# Altium PCB CANLink.PcbDoc (part 1 of 2)
Units mm, origin at the board's own origin, x right, y up, seen from the top; angles counter-clockwise.
Board outline 75 x 49 mm, 2 copper layers (Top Layer, Bottom Layer); 106 components, 90 nets, 440 pads, 174 vias.
Unrouted connection lines stored in the file: 6.
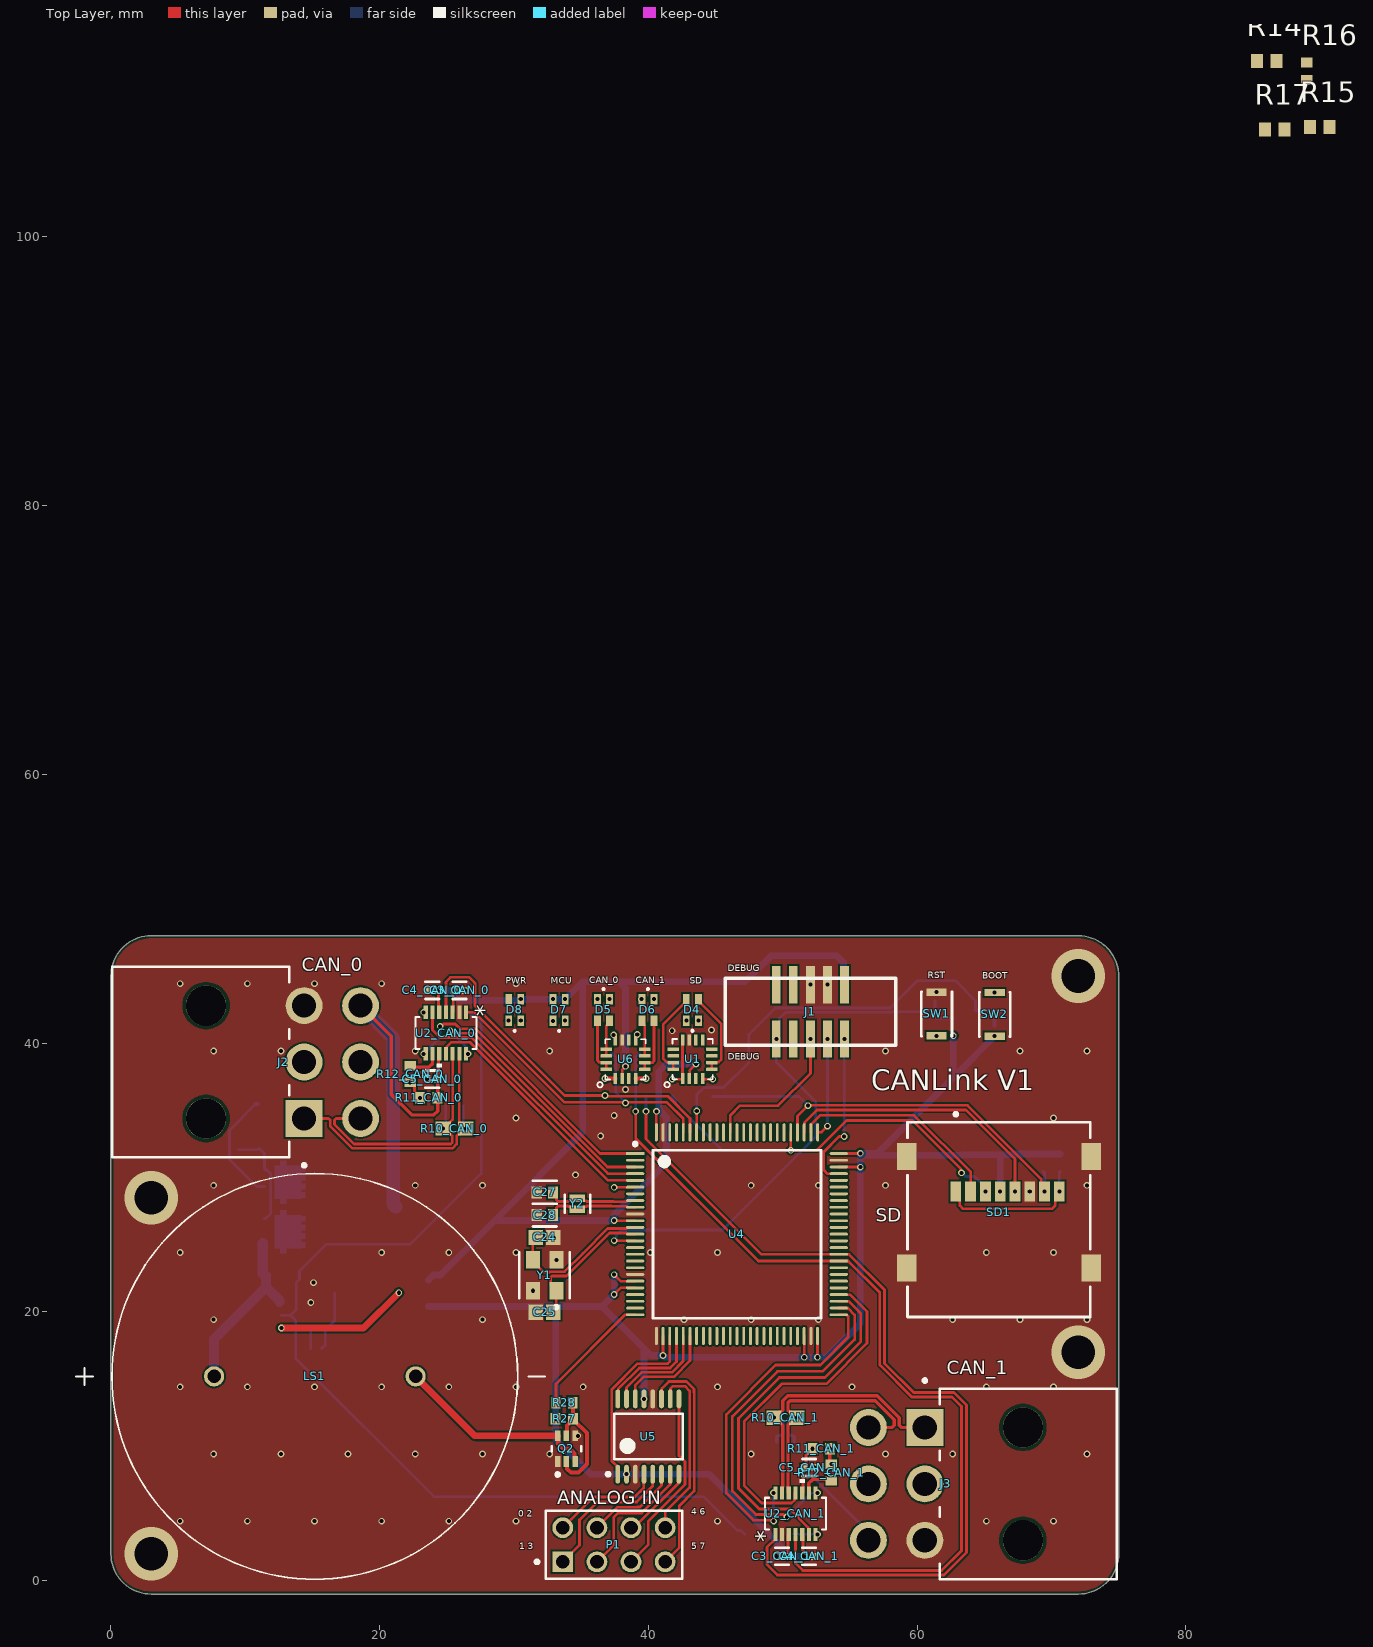
[diagram p0: Top Layer view]
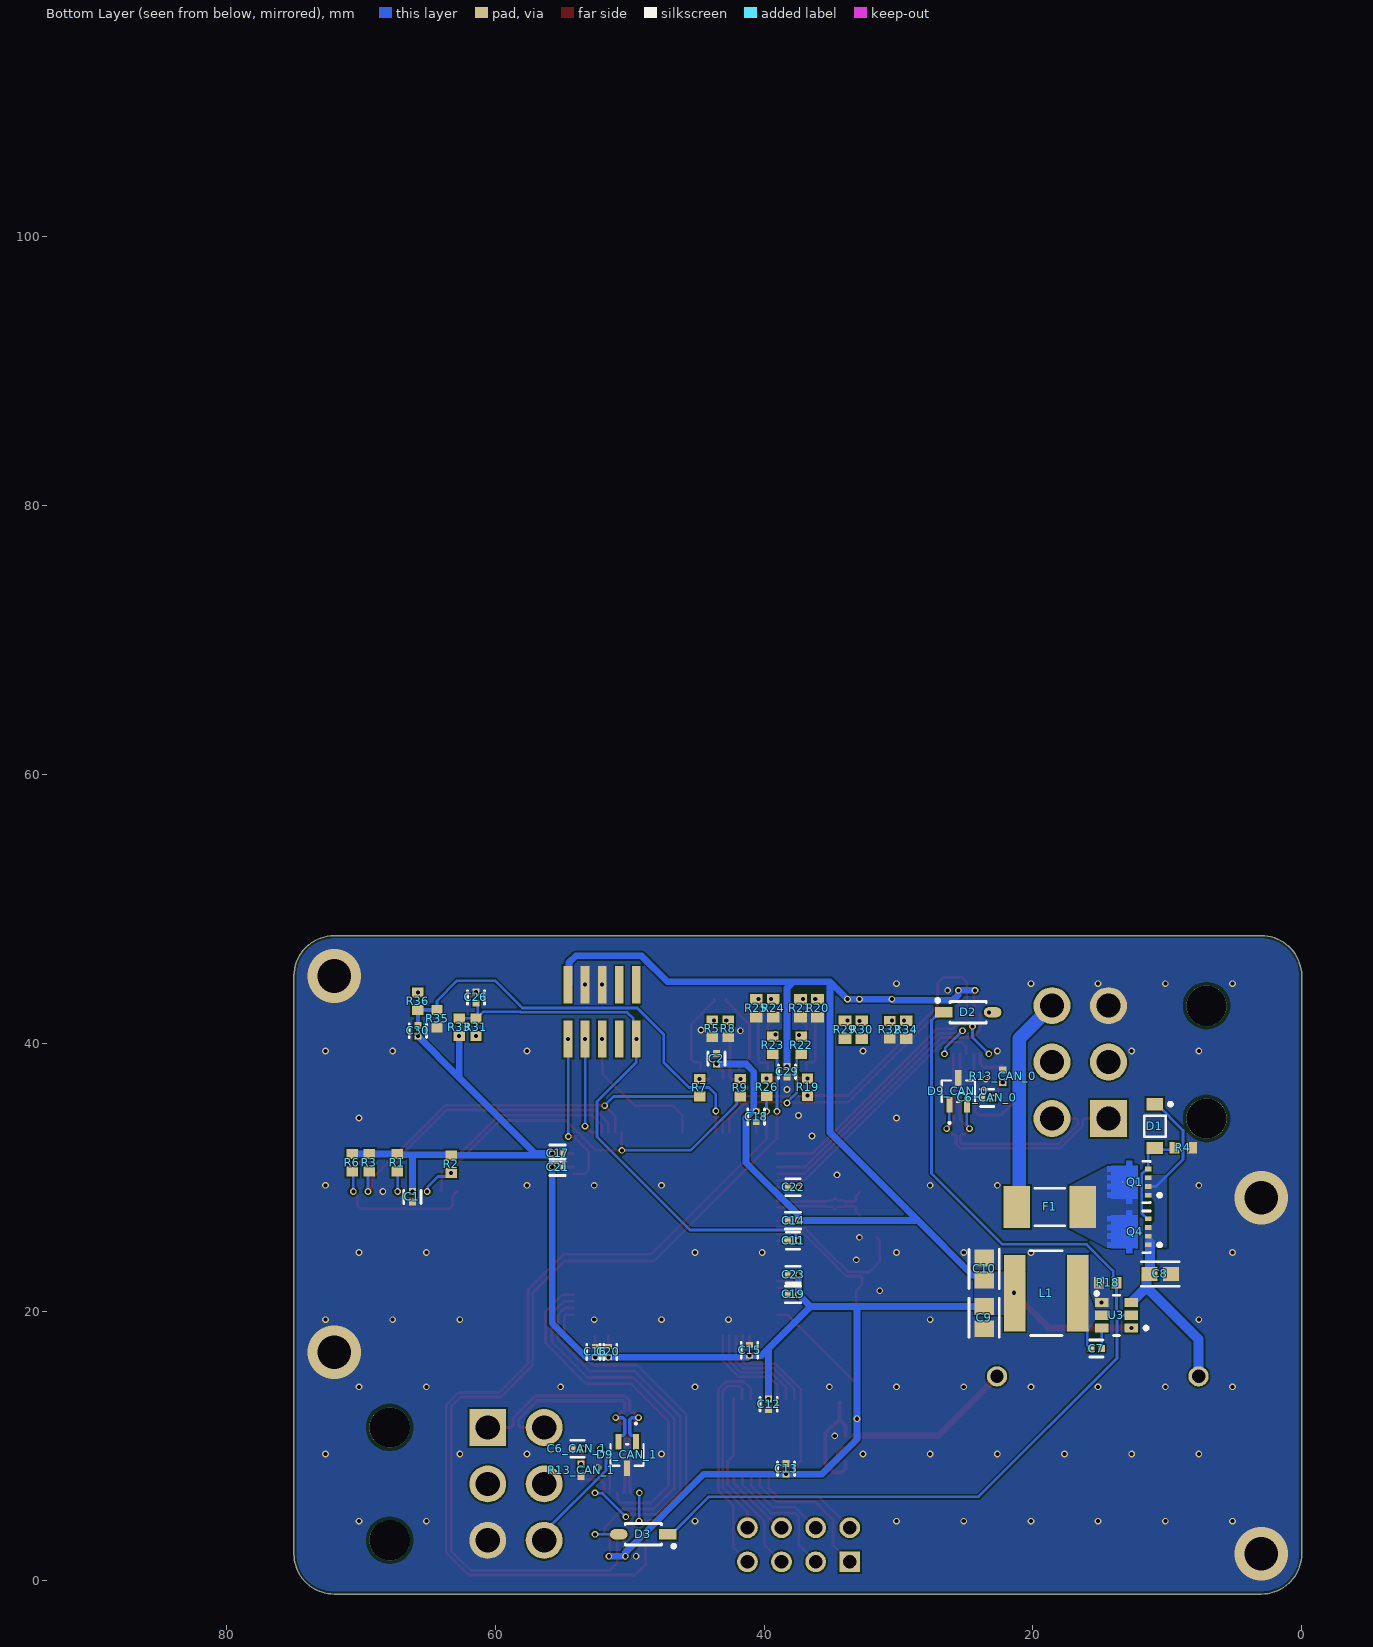
[diagram p1: Bottom Layer view, seen from below]
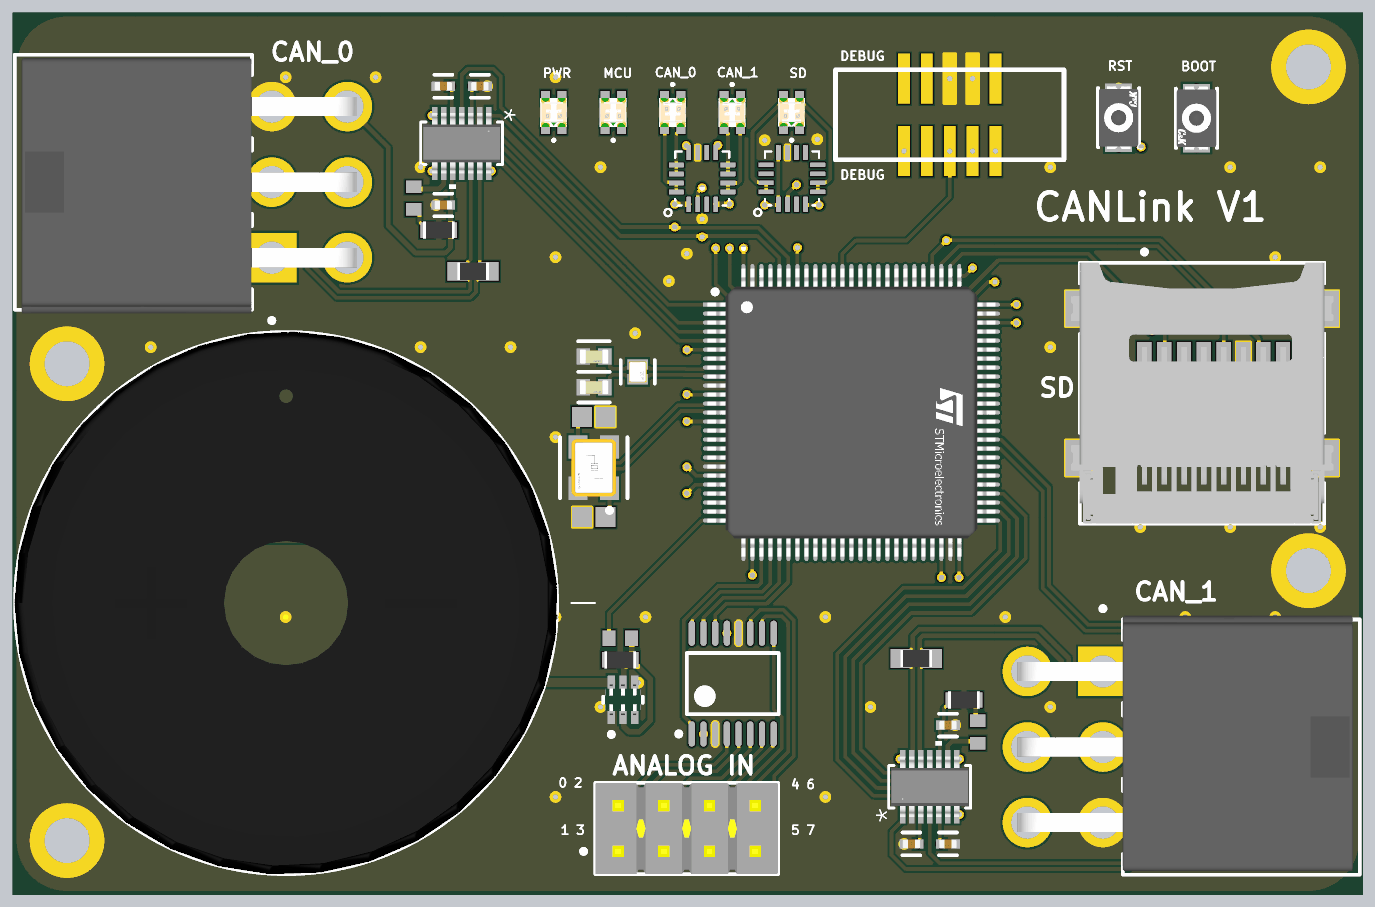
[diagram p3: 3D render of the assembled board from above, using the file's embedded part models]
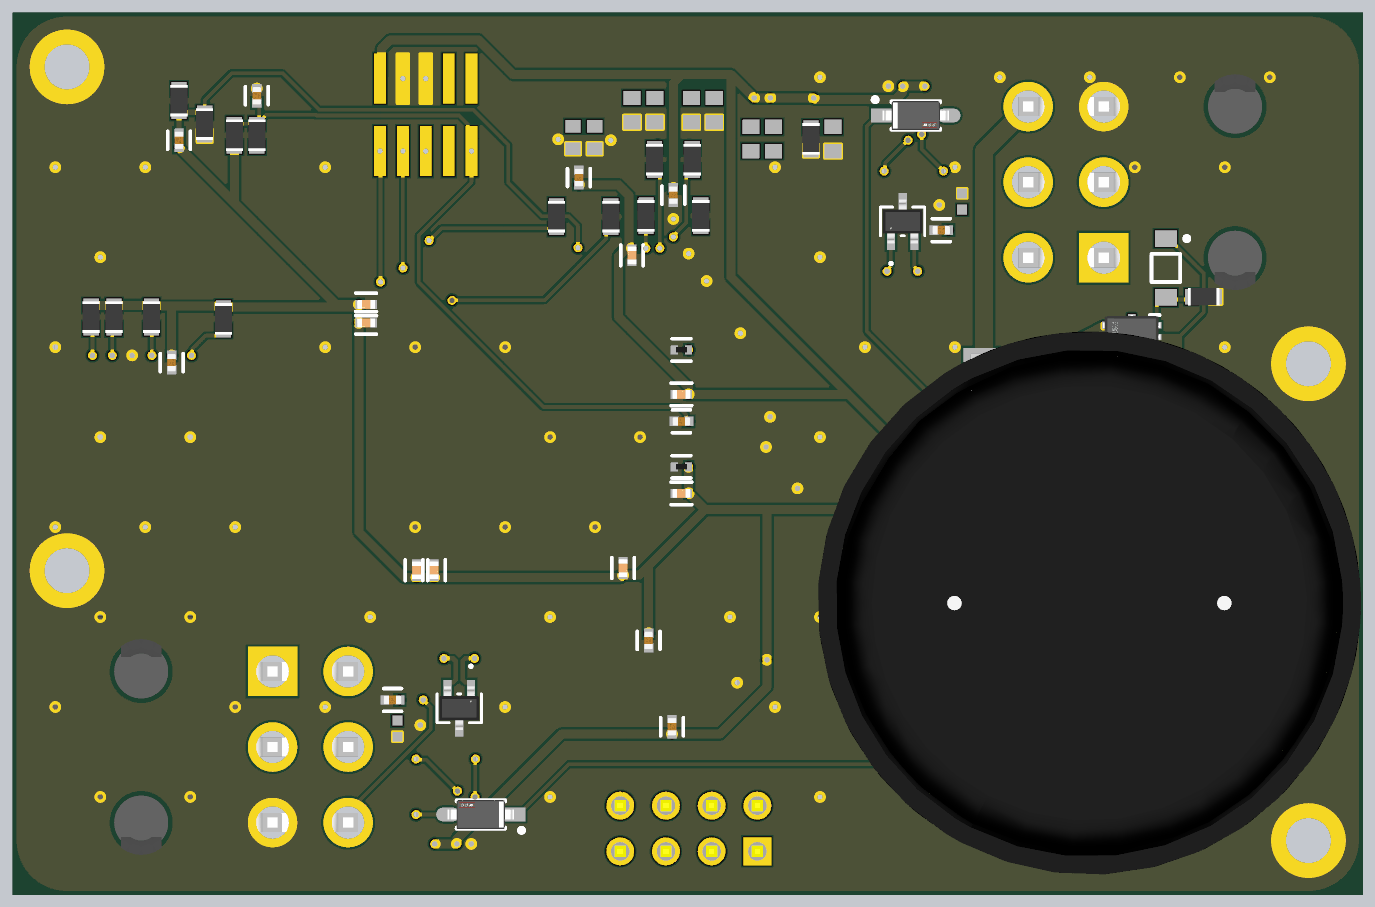
[diagram p4: 3D render of the assembled board from below, using the file's embedded part models]

## Layer stack, top to bottom
Top Solder: solder mask 0.0102, Solder Resist, Dk 3.5
Top Layer: signal copper 0.0356
Dielectric 1: dielectric 0.32, FR-4, Dk 4.8
Bottom Layer: signal copper 0.0356
Bottom Solder: solder mask 0.0102, Solder Resist, Dk 3.5

## Board outline
0,2 0,45 cw(c3,45) 3,48 72,48 cw(c72,45) 75,45 75,2 cw(c72,2) 72,-1 3,-1 cw(c3,2)

## Design rules (kind name [scope] priority, off if disabled: settings)
BoardOutlineClearance [All] p1: gap=0.2 ignorepadtopadclearanceinfootprint=FALSE
Clearance [All] p1: gap=0.127 ignorepadtopadclearanceinfootprint=FALSE except(0.25: Arc-Hole Track-Hole SMDPad-Hole THPad-Hole Via-Hole Fill-Hole Poly-Hole Region-Hole Text-Hole)
ComponentClearance [All] p1: gap=0.127 collisioncheckmode=3 verticalgap=0.127 showdistances=TRUE
DiffPairsRouting [All] p1: maxlimit=0.254 minlimit=0.127 mostfreqgap=0.127 toplayer_minwidth=0.127 toplayer_maxwidth=25.4 toplayer_prefwidth=0.127 bottomlayer_minwidth=0.127 bottomlayer_maxwidth=25.4 bottomlayer_prefwidth=0.127 maxuncoupledlength=12.7
Height [All] p1: minheight=0 maxheight=1816.048 prefheight=12.7
HoleSize [All] p1: absolutevalues=TRUE maxlimit=6.3 minlimit=0.3 maxpercent=80.000 minpercent=20.000
HoleToHoleClearance [All] p1: gap=0.25 allowstackedmicrovias=FALSE
MinimumAnnularRing [All] p1: minimumring=0.076
MinimumSolderMaskSliver [All] p1: minsoldermaskwidth=0
PlaneClearance [All] p1: clearance=0.127
PlaneConnect PlaneConnectPowerPads [InPadClass('PowerPads')] p1: planeconnectstyle=Direct reliefexpansion=0.508 reliefentries=4 reliefconductorwidth=0.254 reliefairgap=0.254
PlaneConnect [All] p2: pad.planeconnectstyle=Relief pad.reliefexpansion=0.3 pad.reliefentries=4 pad.reliefconductorwidth=0.127 pad.reliefairgap=0.127 via.planeconnectstyle=Direct via.reliefexpansion=0.3 via.reliefentries=4 via.reliefconductorwidth=0.127 via.reliefairgap=0.127
PolygonConnect PolygonConnectPowerPads [All vs (InPadClass('PowerPads'))] p1: connectstyle=Direct reliefconductorwidth=0.254 reliefentries=4 polygonreliefangle="90 Angle" airgapwidth=0.254
PolygonConnect [All] p2: connectstyle=Direct reliefconductorwidth=0.127 reliefentries=4 polygonreliefangle="90 Angle" airgapwidth=0.127
RoomDefinition CAN_1 [InComponentClass('CAN_1')] p1: confinementstyle=ConfineIn formatcopy=TRUE lockcomponents=FALSE outline 55.52,0.798 55.52,13.625 47.9,13.625 47.9,0.798
RoomDefinition CAN_0 [InComponentClass('CAN_0')] p2: confinementstyle=ConfineIn formatcopy=TRUE lockcomponents=FALSE outline 20.361,44.945 20.361,32.118 27.981,32.118 27.981,44.945
RoutingVias [All] p1: holewidth=0.3 width=0.6 viastyle="Through Hole" minholewidth=0.3 minwidth=0.6 maxholewidth=0.6 maxwidth=6.6
SilkToSilkClearance [All] p1: silktosilkclearance=0
SilkToSolderMaskClearance [IsPad] p1: minsilkscreentomaskgap=0.127 clearancetoexposedcopper=TRUE
SolderMaskExpansion [All] p1: expansion=0.075 istentingtop=FALSE
Width [All] p1: maxlimit=25.4 minlimit=0.127 preferedwidth=0.127 minimp=50.000000 maximp=50.000000 favimp=50.000000
20 further rules are at their usual default settings.

## Classes and differential pairs
channel class CAN_IF: CAN_0 CAN_1
component class SD_0: C1 C2 D4 R1 R2 R3 R5 R6 R7 R8 R9 SD1 U1
component class PWR_MGMT: C7 C8 C9 C10 D1 F1 L1 Q1 Q4 R4 R14 R15 R16 R17 R18 U3
component class MCU_0: C11 C12 C13 C14 C15 C16 C17 C18 C19 C20 C21 C22 C23 C24 C25 C26 C27 C28 C29 C30 D5 D6 D7 D8 J1 LS1 Q2 R19 R20 R21 R22 R23 R24 R25 R26 R27 R28 R29 R30 R31 R32 R33 R34 R35 R36 SW1 SW2 U4 U5 U6 Y1 Y2
component class CANLink: D2 D3 J2 J3 P1
component class CAN_1: C3_CAN_1 C4_CAN_1 C5_CAN_1 C6_CAN_1 D9_CAN_1 R10_CAN_1 R11_CAN_1 R12_CAN_1 R13_CAN_1 U2_CAN_1
component class CAN_0: C3_CAN_0 C4_CAN_0 C5_CAN_0 C6_CAN_0 D9_CAN_0 R10_CAN_0 R11_CAN_0 R12_CAN_0 R13_CAN_0 U2_CAN_0
differential pair X: +X_P -X_N
differential pair X32: +X32_P -X32_N
differential pair CAN1: +CAN1_P -CAN1_N
differential pair CAN0: +CAN0_P -CAN0_N

## Components (designator, comment, footprint, x,y, rotation, side; value= is the part's Value field where it differs from the comment)
C1 "C0402C104K8PACTU" FP-C0402-BB-MFG 66.182,28.566 r270 bottom value="0.10 μF"
C2 "C0402C104K8PACTU" FP-C0402-BB-MFG 43.55,38.85 r270 bottom value="0.10 μF"
C3_CAN_0 "C0402C104K8PACTU" FP-C0402-BB-MFG 25.949,43.929 r180 top value="0.10 μF" (schematic designator C3)
C3_CAN_1 "C0402C104K8PACTU" FP-C0402-BB-MFG 49.932,1.814 r0 top value="0.10 μF" (schematic designator C3)
C4_CAN_0 "C0402C104K8PACTU" FP-C0402-BB-MFG 23.917,43.929 r0 top value="0.10 μF" (schematic designator C4)
C4_CAN_1 "C0402C104K8PACTU" FP-C0402-BB-MFG 51.964,1.814 r180 top value="0.10 μF" (schematic designator C4)
C5_CAN_0 "C0402C104K8PACTU" FP-C0402-BB-MFG 23.917,37.325 r0 top value="0.10 μF" (schematic designator C5)
C5_CAN_1 "C0402C104K8PACTU" FP-C0402-BB-MFG 51.964,8.418 r180 top value="0.10 μF" (schematic designator C5)
C6_CAN_0 "C0402C104K8PACTU" FP-C0402-BB-MFG 23.409,35.928 r180 bottom value="0.10 μF" (schematic designator C6)
C6_CAN_1 "C0402C104K8PACTU" FP-C0402-BB-MFG 53.907,9.815 r180 bottom value="0.10 μF" (schematic designator C6)
C7 "C0402C104K8PACTU" FP-C0402-BB-MFG 15.281,17.275 r0 bottom value="0.10 μF"
C8 "GRM188R60J106ME47D" FP-GRM188-0_1-e0_2_0_55-IPC_A 10.525,22.825 r180 bottom
C9 "GRM21BR61E226ME44L" FP-GRM21B-0_2-e0_2_0_7-IPC_B 23.628,19.572 r270 bottom
C10 "GRM21BR61E226ME44L" FP-GRM21B-0_2-e0_2_0_7-IPC_B 23.628,23.197 r90 bottom
C11 "C0402C104K8PACTU" FP-C0402-BB-MFG 37.85,25.3 r0 bottom value="0.10 μF"
C12 "C0402C104K8PACTU" FP-C0402-BB-MFG 39.675,13.125 r270 bottom value="0.10 μF"
C13 "C0402C104K8PACTU" FP-C0402-BB-MFG 38.375,8.325 r90 bottom value="0.10 μF"
C14 "C1005X7S1A225K050BC" FP-C1005-050-0_15-0_1-MFG 37.85,26.8 r180 bottom
C15 "C1005X7S1A225K050BC" FP-C1005-050-0_15-0_1-MFG 41.094,17.15 r270 bottom
C16 "C1005X7S1A225K050BC" FP-C1005-050-0_15-0_1-MFG 52.575,17.025 r270 bottom
C17 "C1005X7S1A225K050BC" FP-C1005-050-0_15-0_1-MFG 55.375,31.8 r0 bottom
C18 "C1005X7S1A225K050BC" FP-C1005-050-0_15-0_1-MFG 40.6,34.525 r90 bottom
C19 "C1005X7S1A225K050BC" FP-C1005-050-0_15-0_1-MFG 37.85,21.3 r180 bottom
C20 "C1005X7S1A225K050BC" FP-C1005-050-0_15-0_1-MFG 51.596,17.029 r270 bottom
C21 "C1005X7S1A225K050BC" FP-C1005-050-0_15-0_1-MFG 55.375,30.775 r0 bottom
C22 "GRM155R71C104KA88D" FP-GRM15-MFG 37.85,29.275 r180 bottom value=0.10μF
C23 "GRM155R71C104KA88D" FP-GRM15-MFG 37.85,22.775 r180 bottom value=0.10μF
C24 "06032U6R8CAT2A" CAPC1508X91X51ML25T26 32.275,25.55 r180 top
C25 "06032U6R8CAT2A" CAPC1508X91X51ML25T26 32.275,19.975 r0 top
C26 "C0402C104K8PACTU" FP-C0402-BB-MFG 61.45,43.4 r90 bottom value="0.10 μF"
C27 "C0603C180J1GACTU" FP-C0603C-CF-MFG 32.292,28.9 r180 top value="18 pF"
C28 "C0603C180J1GACTU" FP-C0603C-CF-MFG 32.292,27.2 r180 top value="18 pF"
C29 "C0402C104K8PACTU" FP-C0402-BB-MFG 38.3,37.875 r270 bottom value="0.10 μF"
C30 "C0402C104K8PACTU" FP-C0402-BB-MFG 65.775,40.925 r270 bottom value="0.10 μF"
D1 "MMSZ5242BT1G" ONSC-SOD-123-2-425-04_V 10.925,33.825 r270 bottom
D2 "1N4148W-TP" FP-SOD-123-IPC_A 24.825,42.3 r180 bottom
D3 "1N4148W-TP" FP-SOD-123-IPC_A 49,3.45 r0 bottom
D4 "150066RG54050" WL-SBCD_0606 43.274,42.475 r180 top
D5 "150066RG54050" WL-SBCD_0606 36.662,42.473 r0 top
D6 "150066RG54050" WL-SBCD_0606 39.968,42.473 r0 top
D7 "150066RG54050" WL-SBCD_0606 33.356,42.473 r180 top
D8 "150066RG54050" WL-SBCD_0606 30.05,42.473 r180 top
D9_CAN_0 "VCAN26A2-03G-E3-08" VCAN26A2-03G-E3-08-Footprint-1 25.553,36.411 r180 bottom (schematic designator D9)
D9_CAN_1 "VCAN26A2-03G-E3-08" VCAN26A2-03G-E3-08-Footprint-1 50.2,9.351 r0 bottom (schematic designator D9)
F1 "0679L1000-05" FP-0679L-MFG 18.75,27.813 r180 bottom value=0.0038Ω
J1 "HYDRA_PROGRAMMING_HEADER" 3220-10-0300-00-Footprint-1 54.6,40.32 r180 top
J2 "455580003" FP-455580003-MFG 6.88,38.595 r90 top
J3 "455580003" FP-455580003-MFG 68.075,7.2 r270 top
L1 "1255AY-3R9N=P3" FP-DG6045C-MFG 19.006,21.4 r0 bottom
LS1 "AI-3035-TT-12V-R" AI-3035-TT-12V-R-Footprint-1 15.175,15.2 r0 top
P1 "TSW-104-08-L-D" SMTC-TSW-104-08-L-D_V 37.44,2.67 r0 top
Q1 "SISH615ADN-T1-GE3" SISH615ADN-T1-GE3-Footprint-1 12.825,29.625 r90 bottom
Q2 "SSM6N7002KFU,LF" FP-SSOP6-P-0_65A-MFG 33.9,9.825 r90 top
Q4 "SISH615ADN-T1-GE3" SISH615ADN-T1-GE3-Footprint-1 12.825,25.925 r90 bottom
R1 "ERJ3EKF1002V" RESC1609X55X30LL15T15 67.3,31.1 r90 bottom
R2 "ERJ3EKF1002V" RESC1609X55X30LL15T15 63.3,31 r90 bottom
R3 "ERJ3EKF1002V" RESC1609X55X30LL15T15 69.389,31.099 r90 bottom
R4 "ERJ3EKF1002V" RESC1609X55X30LL15T15 8.825,32.225 r180 bottom
R5 "ERJ-3EKF1001V" RESC1608X55X30LL15T15#1 43.875,41.075 r270 bottom
R6 "ERJ3EKF1002V" RESC1609X55X30LL15T15 70.659,31.099 r90 bottom
R7 "ERJ3EKF1002V" RESC1609X55X30LL15T15 44.8,36.675 r90 bottom
R8 "ERJ-3EKF1001V" RESC1608X55X30LL15T15#1 42.675,41.075 r270 bottom
R9 "ERJ3EKF1002V" RESC1609X55X30LL15T15 41.775,36.675 r270 bottom
R10_CAN_0 "ERJ-3EKF1200V" RESC1609X55X30ML15T15 25.568,33.642 r0 top (schematic designator R10)
R10_CAN_1 "ERJ-3EKF1200V" RESC1609X55X30ML15T15 50.2,12.125 r180 top (schematic designator R10)
R11_CAN_0 "ERJ3EKF1002V" RESC1609X55X30LL15T15 23.663,35.928 r180 top (schematic designator R11)
R11_CAN_1 "ERJ3EKF1002V" RESC1609X55X30LL15T15 52.853,9.815 r0 top (schematic designator R11)
R12_CAN_0 "ERJ-3EKF1001V" RESC1608X55X30LL15T15#1 22.266,37.706 r270 top (schematic designator R12)
R12_CAN_1 "ERJ-3EKF1001V" RESC1608X55X30LL15T15#1 53.615,8.037 r90 top (schematic designator R12)
R13_CAN_0 "0402 JUMPER 0 OHM" RESC1005X40X25NL05T05 22.247,37.521 r270 bottom (schematic designator R13)
R13_CAN_1 "0402 JUMPER 0 OHM" RESC1005X40X25NL05T05 53.634,8.222 r90 bottom (schematic designator R13)
R14 "ERJ-3EKF1003V" RESC1608X55X30ML15T15 86.025,113.1 r0 top
R15 "ERJ-3EKF1003V" RESC1608X55X30ML15T15 89.975,108.2 r0 top
R16 "ERJ3EKF1002V" RESC1609X55X30LL15T15 89,112.325 r90 top
R17 "ERJ-3EKF1003V" RESC1608X55X30ML15T15 86.614,108.009 r0 top
R18 "ERJ3EKF1002V" RESC1609X55X30LL15T15 14.431,22.175 r0 bottom
R19 "ERJ3EKF1002V" RESC1609X55X30LL15T15 36.775,36.725 r90 bottom
R20 "ERJ3EKF51R0V" RESC1608X55X30NL15T15 36.025,42.6 r270 bottom
R21 "ERJ3EKF51R0V" RESC1608X55X30NL15T15 37.3,42.6 r270 bottom
R22 "ERJ3EKF1002V" RESC1609X55X30LL15T15 37.25,39.85 r90 bottom
R23 "ERJ3EKF1002V" RESC1609X55X30LL15T15 39.35,39.85 r90 bottom
R24 "ERJ3EKF51R0V" RESC1608X55X30NL15T15 39.325,42.6 r270 bottom
R25 "ERJ3EKF51R0V" RESC1608X55X30NL15T15 40.6,42.6 r270 bottom
R26 "ERJ3EKF1002V" RESC1609X55X30LL15T15 39.825,36.725 r90 bottom
R27 "ERJ3EKF1002V" RESC1609X55X30LL15T15 33.75,12.048 r180 top
R28 "ERJ-3EKF1001V" RESC1608X55X30LL15T15#1 33.75,13.25 r0 top
R29 "ERJ3EKF51R0V" RESC1608X55X30NL15T15 33.988,40.998 r270 bottom
R30 "ERJ3EKF51R0V" RESC1608X55X30NL15T15 32.737,40.998 r270 bottom
R31 "ERJ-3EKF3300V" RESC1608X55X30LL15T15#2 61.45,41.2 r270 bottom
R32 "ERJ-3EKF3300V" RESC1608X55X30LL15T15#2 30.65,40.998 r270 bottom
R33 "ERJ3EKF1002V" RESC1609X55X30LL15T15 62.7,41.2 r90 bottom
R34 "ERJ3EKF51R0V" RESC1608X55X30NL15T15 29.425,40.998 r270 bottom
R35 "ERJ3EKF1002V" RESC1609X55X30LL15T15 64.35,41.825 r90 bottom
R36 "ERJ-3EKF3300V" RESC1608X55X30LL15T15#2 65.775,43.125 r90 bottom
SD1 "47219-2001" MOLX-47219-2001-8_V 66.087,27.416 r0 top
SW1 "KXT331LHS" FP-KXT331LHS-MFG 61.45,42.175 r90 top
SW2 "KXT331LHS" FP-KXT331LHS-MFG 65.775,42.15 r270 top
U1 "LM2902Q4T" LM2902Q4T-Footprint-1 43.29,38.805 r90 top
U2_CAN_0 "TCAN1146DYYRQ1" TCAN1146DYYRQ1-Footprint-1 24.933,40.754 r270 top (schematic designator U2)
U2_CAN_1 "TCAN1146DYYRQ1" TCAN1146DYYRQ1-Footprint-1 50.948,4.989 r90 top (schematic designator U2)
U3 "AP63203WU-7" FP-TSOT26-MFG 13.781,19.75 r0 bottom
U4 "STM32H730VBT6" FP-LQFP100-1L-IPC_C 46.594,25.788 r0 top
U5 "ADC088S022CIMT/NOPB" MTC16_L 40,10.725 r90 top
U6 "LM2902Q4T" LM2902Q4T-Footprint-1 38.3,38.8 r90 top
Y1 "ABM8-48.000MHZ-B2-T" FP-ABM8-MFG 32.275,22.725 r90 top
Y2 "ECS-.327-12.5-1210-TR" FP-ECX-1210-MFG 34.717,28.05 r270 top

## Footprints (in the part's own frame and the unit in brackets; to place one, negate y for a bottom-side part, rotate by r counter-clockwise, add the part's x,y. Pads: shape width x height; smd on the part's side, far side on the other; paste and mask are expansions set on the pad)
3220-10-0300-00-Footprint-1 [mm]
  rect 0.65x2.77 all layers, no hole: 1(0,-4.03) 2(0,0) 3(1.27,-4.03) 4(1.27,0) 5(2.54,-4.03) 6(2.54,0) 7(3.81,-4.03) 8(3.81,0) 9(5.08,-4.03) 10(5.08,0)
  silkscreen extent -3.81,-4.51 8.89,0.49
AI-3035-TT-12V-R-Footprint-1 [mm]
  round 1.508 hole 1: N(7.5,0) P(-7.5,0)
  silkscreen extent -17.78,-15.1 17.14,15.1, body extent -15.1,-15.1 15.1,15.1, height 2.15
CAPC1508X91X51ML25T26 [mm] "Chip Capacitor, 2-Leads, Body 1.52x0.76mm, IPC Low Density"
  rect 1.1x1.12 smd: 1(-0.65,0) 2(0.65,0)
  body extent -0.89,-0.51 0.88,0.5, height 0.91
FP-0679L-MFG [mm]
  rect 1.96x3.15 smd paste+0 mask+0: 1(-2.455,0) 2(2.455,0)
  silkscreen extent -1.1,-1.4 1.1,1.4, body extent -3.05,-1.29 3.05,1.25, height 2.54
FP-455580003-MFG [mm]
  rect 2.75x2.75 hole 1.8 paste-2539.97 mask+0: 1(-4.2,-7.5)
  round 2.75 hole 1.8 paste-2539.97 mask+0: 2(0,-7.5) 3(4.2,-7.5) 4(-4.2,-11.7) 5(0,-11.7) 6(4.2,-11.7)
  round 3 hole 3 unplated paste-2539.97 mask+0: ""(-4.2,-0.2) ""(4.2,-0.2)
  silkscreen extent -7.81,-7.63 7.09,6.78, body extent -7.19,-13.18 7.19,6.88, height 0.25
FP-ABM8-MFG [mm]
  rect 1.3x1.05 smd paste+0 mask+0: 1(-1.15,-0.875) 2(1.15,-0.875) 3(1.15,0.875) 4(-1.15,0.875)
  silkscreen extent -2.5,-1.88 1.7,1.88, body extent -1.6,-1.25 1.6,1.25, height 0.8
FP-C0402-BB-MFG [mm]
  rect 0.52x0.52 smd paste+0 mask+0: 1(-0.4,0) 2(0.4,0)
  silkscreen extent -0.5,-0.64 0.5,0.64, body extent -0.5,-0.25 0.5,0.25, height 0.55
FP-C0603C-CF-MFG [mm]
  rect 0.75x0.9 smd paste+0 mask+0: 1(-0.6,0) 2(0.6,0)
  silkscreen extent -0.87,-0.85 0.88,0.85, body extent -0.8,-0.4 0.8,0.4, height 0.87
FP-C1005-050-0_15-0_1-MFG [mm]
  rect 0.4x0.5 smd paste+0 mask+0: 1(-0.4,0) 2(0.4,0)
  silkscreen extent -0.58,-0.63 0.58,0.63, body extent -0.5,-0.25 0.5,0.25, height 0.65
FP-DG6045C-MFG [mm]
  rect 1.6x5.7 smd paste+0 mask+0: 1(-2.35,0) 2(2.35,0)
  silkscreen extent -3.87,-3.15 1.17,3.15, body extent -3,-3 3,3, height 4.5
FP-ECX-1210-MFG [mm]
  rect 0.575x1.14 smd paste+0 mask+0: 1(-0.413,0) 2(0.413,0)
  silkscreen extent -0.65,-0.95 0.65,0.95, body extent -0.6,-0.5 0.6,0.5, height 0.5
FP-GRM15-MFG [mm]
  rect 0.4x0.5 smd paste+0 mask+0: 1(-0.4,0) 2(0.4,0)
  silkscreen extent -0.53,-0.63 0.53,0.63, body extent -0.3,-0.16 0.3,0.16, height 0.33
FP-GRM21B-0_2-e0_2_0_7-IPC_B [mm]
  rect 1.255x1.456 smd paste+0 mask+0: 1(-0.826,0) 2(0.826,0)
  silkscreen extent -1.45,-1.13 1.45,1.13, body extent -1,-0.63 1,0.63, height 1.45
FP-GRM188-0_1-e0_2_0_55-IPC_A [mm]
  rect 1.208x1.012 smd paste+0 mask+0: 1(-0.802,0) 2(0.802,0)
  silkscreen extent -1.41,-0.91 1.41,0.91, body extent -0.8,-0.4 0.8,0.4, height 0.9
FP-KXT331LHS-MFG [mm]
  rect 0.55x1.5 smd paste+0 mask+0: 1(-1.625,0) 2(1.625,0)
  silkscreen extent -1.65,-1.15 1.65,1.15, body extent -2,-1.25 2,1.25, height 0.25
FP-LQFP100-1L-IPC_C [mm]
  rect 1.355x0.212 smd paste+0 mask+0: 1(-7.575,6)
  rrect100% 1.355x0.212 smd paste+0 mask+0: 2(-7.575,5.5) 3(-7.575,5) 4(-7.575,4.5) 5(-7.575,4) 6(-7.575,3.5) 7(-7.575,3) 8(-7.575,2.5) 9(-7.575,2) 10(-7.575,1.5) 11(-7.575,1) 12(-7.575,0.5) 13(-7.575,0) 14(-7.575,-0.5) 15(-7.575,-1) 16(-7.575,-1.5) 17(-7.575,-2) 18(-7.575,-2.5) 19(-7.575,-3) 20(-7.575,-3.5) 21(-7.575,-4) 22(-7.575,-4.5) 23(-7.575,-5) 24(-7.575,-5.5) 25(-7.575,-6) 51(7.575,-6) 52(7.575,-5.5) 53(7.575,-5) 54(7.575,-4.5) 55(7.575,-4) 56(7.575,-3.5) 57(7.575,-3) 58(7.575,-2.5) 59(7.575,-2) 60(7.575,-1.5) 61(7.575,-1) 62(7.575,-0.5) 63(7.575,0) 64(7.575,0.5) 65(7.575,1) 66(7.575,1.5) 67(7.575,2) 68(7.575,2.5) 69(7.575,3) 70(7.575,3.5) 71(7.575,4) 72(7.575,4.5) 73(7.575,5) 74(7.575,5.5) 75(7.575,6)
  rrect100% 0.212x1.355 smd paste+0 mask+0: 26(-6,-7.575) 27(-5.5,-7.575) 28(-5,-7.575) 29(-4.5,-7.575) 30(-4,-7.575) 31(-3.5,-7.575) 32(-3,-7.575) 33(-2.5,-7.575) 34(-2,-7.575) 35(-1.5,-7.575) 36(-1,-7.575) 37(-0.5,-7.575) 38(0,-7.575) 39(0.5,-7.575) 40(1,-7.575) 41(1.5,-7.575) 42(2,-7.575) 43(2.5,-7.575) 44(3,-7.575) 45(3.5,-7.575) 46(4,-7.575) 47(4.5,-7.575) 48(5,-7.575) 49(5.5,-7.575) 50(6,-7.575) 76(6,7.575) 77(5.5,7.575) 78(5,7.575) 79(4.5,7.575) 80(4,7.575) 81(3.5,7.575) 82(3,7.575) 83(2.5,7.575) 84(2,7.575) 85(1.5,7.575) 86(1,7.575) 87(0.5,7.575) 88(0,7.575) 89(-0.5,7.575) 90(-1,7.575) 91(-1.5,7.575) 92(-2,7.575) 93(-2.5,7.575) 94(-3,7.575) 95(-3.5,7.575) 96(-4,7.575) 97(-4.5,7.575) 98(-5,7.575) 99(-5.5,7.575) 100(-6,7.575)
  silkscreen extent -7.7,-6.25 6.25,6.83, body extent -8,-8 8,8, height 1.6
FP-SOD-123-IPC_A [mm]
  rect 1.308x0.762 smd paste+0 mask+0: 1(-1.825,0)
  rrect100% 1.308x0.762 smd paste+0 mask+0: 2(1.825,0)
  silkscreen extent -2.39,-0.8 1.35,1.01, body extent -1.85,-0.8 1.85,0.8, height 1.35
FP-SSOP6-P-0_65A-MFG [mm]
  rect 0.8x0.4 smd paste+0 mask+0: 1(-0.95,0.65) 2(-0.95,0) 3(-0.95,-0.65) 4(0.95,-0.65) 5(0.95,0) 6(0.95,0.65)
  silkscreen extent -2.05,-1.1 0.18,1.1, body extent -1.05,-1 1.05,1, height 1
FP-TSOT26-MFG [mm]
  rect 1x0.7 smd paste+0 mask+0: 1(-1.099,0.95) 2(-1.099,0) 3(-1.099,-0.95) 4(1.099,-0.95) 5(1.099,0) 6(1.099,0.95)
  silkscreen extent -2.32,-1.5 0.22,1.5, body extent -1.4,-1.45 1.4,1.45, height 1
LM2902Q4T-Footprint-1 [mm]
  rrect25% 0.84x0.26 smd: 1(-1.435,0.75) 2(-1.435,0.25) 3(-1.435,-0.25) 4(-1.435,-0.75) 9(1.435,-0.75) 10(1.435,-0.25) 11(1.435,0.25) 12(1.435,0.75)
  rrect25% 0.26x0.84 smd: 5(-0.75,-1.435) 6(-0.25,-1.435) 7(0.25,-1.435) 8(0.75,-1.435) 13(0.75,1.435) 14(0.25,1.435) 15(-0.25,1.435) 16(-0.75,1.435)
  silkscreen extent -2.09,-1.5 1.5,2.1
MOLX-47219-2001-8_V [mm] "CONN, 8-Leads, Body 14.5x13.6mm, Pitch 1.1mm"
  rect 0.8x1.5 smd: 1(-3.205,1.55) 2(-2.105,1.55) 3(-1.005,1.55) 4(0.095,1.55) 5(1.195,1.55) 6(2.295,1.55) 7(3.395,1.55) 8(4.495,1.55)
  rect 1.45x2 smd: 9(6.875,4.15) 10(6.875,-4.15) 11(-6.875,-4.15) 12(-6.875,4.15)
  silkscreen extent -6.8,-7.8 6.8,7.42, body extent -7.3,-7.79 7.3,6.71, height 1.91
MTC16_L [mm] "TSOP, 16-Leads, Body 5x4.4mm, Pitch 0.65mm, IPC High Density"
  oval 1.4x0.35 smd: 1(-2.8,2.275) 2(-2.8,1.625) 3(-2.8,0.975) 4(-2.8,0.325) 5(-2.8,-0.325) 6(-2.8,-0.975) 7(-2.8,-1.625) 8(-2.8,-2.275) 9(2.8,-2.275) 10(2.8,-1.625) 11(2.8,-0.975) 12(2.8,-0.325) 13(2.8,0.325) 14(2.8,0.975) 15(2.8,1.625) 16(2.8,2.275)
  silkscreen extent -2.92,-2.55 1.7,3.12, body extent -2.25,-2.55 2.25,2.55, height 1.1
ONSC-SOD-123-2-425-04_V [mm] "SOD, 2-Leads, Body 2.69x1.6mm"
  rect 0.91x1.22 smd: 1(-1.635,0) 2(1.635,0)
  silkscreen extent -1.76,-0.8 0.78,1.28, body extent -1.35,-0.8 1.35,0.8, height 1.35
RESC1005X40X25NL05T05 [mm] "Chip Resistor, 2-Leads, Body 1.00x0.50mm, IPC Medium Density"
  rect 0.55x0.55 smd: 1(-0.45,0) 2(0.45,0)
  body extent -0.53,-0.27 0.53,0.28, height 0.4
RESC1608X55X30LL15T15#1 [mm] "Chip Resistor, 2-Leads, Body 1.60x0.80mm, IPC High Density"
  rect 0.7x0.85 smd: 1(-0.625,0) 2(0.625,0)
  body extent -0.87,-0.48 0.87,0.48, height 0.55
RESC1608X55X30LL15T15#2 [mm] "Chip Resistor, 2-Leads, Body 1.75x0.95mm, IPC High Density"
  rect 0.75x0.85 smd: 1(-0.65,0) 2(0.65,0)
  body extent -0.87,-0.48 0.87,0.48, height 0.55
RESC1608X55X30ML15T15 [mm] "Chip Resistor, 2-Leads, Body 1.60x0.80mm, IPC Low Density"
  rect 0.9x1.05 smd: 1(-0.725,0) 2(0.725,0)
  body extent -0.87,-0.48 0.87,0.48, height 0.55
RESC1608X55X30NL15T15 [mm] "Chip Resistor, 2-Leads, Body 1.60x0.80mm, IPC Medium Density"
  rect 0.8x0.95 smd: 1(-0.675,0) 2(0.675,0)
  body extent -0.87,-0.48 0.87,0.48, height 0.55
RESC1609X55X30LL15T15 [mm] "Chip Resistor, 2-Leads, Body 1.75x0.95mm, IPC High Density"
  rect 0.75x0.85 smd: 1(-0.65,0) 2(0.65,0)
  body extent -0.87,-0.48 0.87,0.48, height 0.55
RESC1609X55X30ML15T15 [mm] "Chip Resistor, 2-Leads, Body 1.75x0.95mm, IPC Low Density"
  rect 1.15x1.05 smd: 1(-0.85,0) 2(0.85,0)
  body extent -0.87,-0.48 0.87,0.48, height 0.55
SISH615ADN-T1-GE3-Footprint-1 [mm]
  rect 0.35x0.5 smd paste+0 mask+0: 1(-0.937,-1.4) 2(-0.288,-1.4) 3(0.363,-1.4) 4(1.012,-1.4)
  round 0.025 smd: 5-6-7-8(0.038,0.51)
  Top Layer region: -1.187,-0.63 -1.187,-0.215 -1.568,-0.215 -1.568,0.215 -1.187,0.215 -1.187,1.35 -1.137,1.35 -1.137,1.65 -0.737,1.65 -0.737,1.35 -0.487,1.35 -0.487,1.65 -0.088,1.65 -0.088,1.35 0.163,1.35 0.163,1.65 0.563,1.65 0.563,1.35 0.813,1.35 0.813,1.65 1.212,1.65 1.212,1.35 1.262,1.35 1.262,0.215 1.643,0.215 1.643,-0.215 1.262,-0.215 1.262,-0.63
  silkscreen extent -1.51,-2.37 1.59,-1.01, body extent -1.51,-1.6 1.59,1.6, height 0.9
SMTC-TSW-104-08-L-D_V [mm] "CONN, 8-Leads, Body 10.16x5.08mm, Pitch 2.54mm"
  rect 1.55x1.55 hole 1.02: 1(-3.81,-1.27)
  round 1.55 hole 1.02: 2(-3.81,1.27) 3(-1.27,-1.27) 4(-1.27,1.27) 5(1.27,-1.27) 6(1.27,1.27) 7(3.81,-1.27) 8(3.81,1.27)
  silkscreen extent -5.85,-2.54 5.08,2.54, body extent -5.08,-2.54 5.08,2.54, height 8.38
TCAN1146DYYRQ1-Footprint-1 [mil]
  rect 38.5x12 smd paste+0 mask+0: 1(-60.75,59.07) 2(-60.75,39.38) 3(-60.75,19.69) 4(-60.75,0) 5(-60.75,-19.69) 6(-60.75,-39.38) 7(-60.75,-59.07) 8(60.75,-59.07) 9(60.75,-39.38) 10(60.75,-19.69) 11(60.75,0) 12(60.75,19.69) 13(60.75,39.38) 14(60.75,59.07)
  silkscreen extent -47,-90 100,90, body extent -66,-84 66,84, height 43
VCAN26A2-03G-E3-08-Footprint-1 [mil]
  rect 18x46 smd paste+0 mask+0: 1(-25.59,-39) 2(25.59,-39) 3(0,39)
  silkscreen extent -49,-95 49,32, body extent -44,-48 44,48, height 39
WL-SBCD_0606 [mm] "SMT Bi-color Chip LED Diffuesed, body 1.5x1.6mm"
  rect 0.5x0.8 smd: 1(-0.45,0.8) 2(-0.45,-0.8) 3(0.45,-0.8) 4(0.45,0.8)
  silkscreen extent -0.08,1.48 0.07,1.62, body extent -0.75,-0.8 0.75,0.8, height 0.55

## Part data
C1 C2 C3_CAN_0 C3_CAN_1 C4_CAN_0 C4_CAN_1 C5_CAN_0 C5_CAN_1 C6_CAN_0 C6_CAN_1 C7 C11 C12 C13 C26 C29 C30: library part CMP-2008-02046-2, "CAP CER 0.1UF 10V X5R 0402", Capacitance="0.10 μF", Manufacturer=Kemet, Package=C0402-BB, Temperature="-55°C to +125°C", Temperature Characteristic=X5R, Temperature Coefficient=15%, Temperature Range High=+125°C, Temperature Range Low=-55°C, Tolerance=0.1, Voltage Rating="10 V", Automotive=No, Category=Cap, ComponentLink2Description=Datasheet, ComponentLink2URL=https://content.kemet.com/datasheets/KEM_C1002_X7R_SMD.pdf, Device Class L1="Passive Components", Device Class L2=Capacitors, Device Class L3="Ceramic Capacitors", Digikey Description="CAP CER 0.1UF 10V X5R 0402", Height=0.55mm, Ipc Land Pattern Name=CAPC10050X50, Lead Free=Yes, Manufacturer Part Number=C0402C104K8PACTU, Material=Ceramic, Mouser Description="Capacitor 100 nF 10 VDC 0402", Octopart=https://octopart.com/c0402c104k8pactu-kemet-140039, RoHS=TRUE
C8: library part CMP-2006-02792-2, "Chip Multilayer Ceramic Capacitors for General Purpose, 0603, 10uF, X5R, 15%, 20%, 6.3V", Capacitance=10uF, Case Code (Imperial)=0603, Case Code (Metric)=1608, Dielectric=X5R, Max Operating Temperature=85°C, Min Operating Temperature=-55°C, Package Quantity=4000, Tolerance=20%, Voltage=6.3V, Case/Package=0603, Depth=0.8mm, Height=0.8mm, Lead Free="Lead Free", Length=1.6mm, Material=Ceramic, Mount="Surface Mount", Packaging="Tape and Reel", Radiation Hardening=No, REACH SVHC="No SVHC", Termination=SMD/SMT, Thickness=0.035inch, Voltage Rating=6.3V, Voltage Rating (DC)=6.3V, Width=0.031inch
C9 C10: library part CMP-2007-03222-3, "Chip Multilayer Ceramic Capacitors for General Purpose, 0805, 22uF, X5R, 15%, 20%, 25V", Capacitance=22uF, Case Code (Imperial)=0805, Case Code (Metric)=2012, Dielectric=X5R, Max Operating Temperature=85°C, Min Operating Temperature=-55°C, Package Quantity=3000, Resistor Type=Ceramic, Tolerance=20%, Voltage=25V, Case/Package=0805, Depth=1.25mm, Height=1.25mm, Lead Free="Lead Free", Length=2mm, Material=Ceramic, Mount="Surface Mount", Packaging="Tape and Reel", REACH SVHC="No SVHC", Termination=SMD/SMT, Thickness=0.057inch, Voltage Rating=25V, Voltage Rating (DC)=25V, Weight=0.000335oz, Width=1.25mm
C14 C15 C16 C17 C18 C19 C20 C21: library part CMP-08246-004344-1, "CAP CER 2.2UF 10V X7S 0402", Capacitance=2.2uF, Case Code (Imperial)=0402, Case Code (Metric)=1005, Dielectric=X7S, Dielectric Material=Ceramic, Max Operating Temperature=125°C, Min Operating Temperature=-55°C, Package Quantity=1, Tolerance=10%, Voltage Rating=10V, Case/Package=0402, Depth=0.5mm, Height=0.5mm, Lead Free="Lead Free", Length=1mm, Mount="Surface Mount", Packaging="Tape and Reel", Resistor Type=Ceramic, RoHS Compliant=Yes, Series=C, Termination=SMD/SMT, Thickness=0.022inch, Voltage Rating (DC)=10V, Weight=2.3E-05oz, Width=0.02inch
C22 C23: library part CMP-2100-03641-2, "CAP CER 0.1UF 16V X7R 0402", Capacitance=0.10μF, Manufacturer=Murata, Package=GRM15, Temperature="-55°C to +125°C", Temperature Characteristic=X7R, Temperature Range High=+125°C, Temperature Range Low=-55°C, Tolerance=10%, Voltage Rating=16Vdc, Category=Cap, ComponentLink2Description=Datasheet, ComponentLink2URL=https://search.murata.co.jp/Ceramy/image/img/A01X/G101/ENG/GRM155R71H471KA01-01A.pdf, Device Class L1="Passive Components", Device Class L2=Capacitors, Device Class L3="Ceramic Capacitors", Digikey Description="CAP CER 0.1UF 16V X7R 0402", Height=0.55mm, Ipc Land Pattern Name=CAPC10050X219, Lead Free=yes, Manufacturer Part Number=GRM155R71C104KA88D, Material=Ceramic, Mouser Description="0402 0.1 uF 16V ±10 % Tolerance X7R SMT Multilayer Ceramic Capacitor", Octopart=https://octopart.com/grm155r71c104ka88d-murata-196880, RoHS=TRUE, Standoff Height=0mm
C24 C25: library part CMP-2006-02205-1, Manufacturer="AVX Interconnect / Elco", Part Number=06032U6R8CAT2A
C27 C28: library part CMP-2006-03103-2, "CAP CER 18PF 100V 5% NP0 0603", Capacitance="18 pF", Manufacturer=KEMET, Package=C0603C-CF, Temperature="-55°C to +125°C", Temperature Characteristic=C0G, Temperature Coefficient=30ppm/°C, Temperature Range High=+125°C, Temperature Range Low=-55°C, Tolerance=0.05, Voltage Rating="100 V", Automotive=Yes, Automotive Grade="Grade 1", Category=Cap, ComponentLink2Description=Datasheet, ComponentLink2URL=https://api.kemet.com/component-edge/download/datasheet/C0603C100J5GACAUTO.pdf, Device Class L1="Passive Components", Device Class L2=Capacitors, Device Class L3="Ceramic Capacitors", Digikey Description="CAP CER 18PF 100V 5% NP0 0603", Height=0.87mm, Lead Free=Yes, Manufacturer Part Number=C0603C180J1GACTU, Material=Ceramic, Mouser Description="Multilayer Ceramic Capacitors MLCC - SMD/SMT 100volts 18pF C0G 5%", Octopart=https://octopart.com/c0603c180j1gactu-kemet-9138579, RoHS=TRUE
D1: library part CMP-1060-00565-1, "Zener Voltage Regulator, 500 mW, 2-Pin SOD-123, Pb-Free, Tape and Reel", Manufacturer="On Semiconductor", ComponentLink1Description="Manufacturer URL", ComponentLink1URL=http://www.onsemi.com/, ComponentLink2Description=Datasheet, ComponentLink2URL=http://www.onsemi.com/pub_link/Collateral/MMSZ5221BT1-D.PDF, ComponentLink3Description="Package Specification", ComponentLink3URL=http://www.onsemi.com/pub_link/Collateral/425-04.PDF, DatasheetVersion="Rev. 12", Mounting Technology="Surface Mount", P Max (W)=0.5, PackageDescription="2-Pin SOD, Body 1.6 x 2.69 mm", PackageReference=SOD-123-2-425-04, PackageVersion="Rev. G, 10/2009", Packing="Tape and Reel", PartNumber=MMSZ5242BT1G, RoHS=Pb-Free, VZ Typ (V)=12
D2 D3: library part CMP-2000-04993-2, "DIODE GEN PURP 100V 150MA SOD123", Average Rectified Current=150mA, Capacitance=4pF, Forward Voltage=1V, Max Forward Surge Current (Ifsm)=1A, Max Operating Temperature=150°C, Max Repetitive Reverse Voltage (Vrrm)=100V, Max Reverse Leakage Current=5uA, Max Surge Current=2A, Min Operating Temperature=-65°C, Package Quantity=3000, Power Dissipation=400mW, Current Rating=150mA, Element Configuration=Single, Forward Current=150mA, Height=1.2mm, Lead Free="Lead Free", Length=2.85mm, Max Reverse Voltage (DC)=100V, Mount="Surface Mount", Number of Pins=2, Output Current=150mA, Packaging="Tape and Reel", Peak Non-Repetitive Surge Current=2A, Polarity=Standard, Radiation Hardening=No, Recovery Time=4ns, Reverse Recovery Time=4ns, Voltage Rating (DC)=100V, Width=1.8mm
D4 D5 D6 D7 D8: library part CMP-004-00034-2, "Led, Red/Grn, 180Mcd/230Mcd, 624Nm/525Nm Rohs Compliant: Yes"
D9_CAN_0 D9_CAN_1: library part CMP-004-00042-1, "ESD Suppressor Diode TVS Bi-Dir 26.5V 3-Pin SOT-323 T/R"
F1: library part CMP-16042-000002-1, "DIFF P#!!! /  / FUSE BRD MNT 1A 125VAC/VDC", Fuse Current=15A, Fuse Interrupt Ac Current=50A, Fuse Interrupt Dc Current=300A, Fuse Voltage Drop=0.13V, Manufacturer="Bel Fuse", Manufacturer Part Number=0679L9150-01, Max Fuse Ac Voltage=125V, Package=0679L, Resistance=0.0038Ω, Temperature="-55°C to +125°C", Temperature Range High=+125°C, Temperature Range Low=-55°C, Automotive=Yes, Automotive Grade="Grade 1", Category=Fuse, ComponentLink2Description=Datasheet, ComponentLink2URL=https://www.belfuse.com/resources/CircuitProtection/datasheets/0679L%20Sep2016.pdf, Device Class L1="Circuit Protection", Device Class L2=Fuses, Device Class L3=unset, Digikey Description="FUSE BRD MNT 15A 125VAC/VDC", Fuse Blow Speed=Fast, Fuse I2T=103.5A2Sec, Height=2.79mm, Ipc Land Pattern Name=CAPC610254X254, Lead Free=Yes, Max Fuse Dc Voltage=125V, Octopart=https://octopart.com/0679l9150-01-bel+fuse-70850665, RoHS=TRUE, Voltage Rating=125V
J1: library part CMP-002-00075-1, "CONN HEADER SMD 10POS 1.27MM (specifically compatible with J-Link EDU cable) PN: 3220-10-0300-00"
J2 J3: library part CMP-04776-000024-1, "CONN HEADER R/A 6POS 4.2MM", Current Rating=8A, Manufacturer=Molex, Package=0, Temperature="-40°C to +105°C", Temperature Range High=+105°C, Temperature Range Low=-40°C, Voltage Rating=600V, Automotive=No, Category=Conn, ComponentLink2Description=Datasheet, ComponentLink2URL=https://www.molex.com/webdocs/datasheets/pdf/en-us/0455580003_PCB_HEADERS.pdf, Conn Gender=Male, Conn Orientation="Right Angle", Contact Material=Tin,Nickel, Device Class L1=Connectors, Device Class L2="Headers and Wire Housings", Device Class L3=unset, Digikey Description="CONN HEADER R/A 6POS 4.2MM", Footprint Url=https://www.molex.com/pdm_docs/sd/455580003_sd.pdf, Height=10.38mm, Lead Free=Yes, Manufacturer Part Number=455580003, Mouser Description="Conn Power HDR 6 POS 4.2mm Solder ST Thru-Hole 6 Terminal 1 Port Mini-Fit Jr™ Tray", Number Of Contacts=6, Number Of Rows=2, Octopart=https://octopart.com/45558-0003-molex-7672845, Pitch=4.2mm, RoHS=TRUE, Standoff Height=0.4mm
L1: library part CMP-06042-002684-1, "Shielded Wirewound Inductor 3.9uH 30% 4200mA 0.0264Ω SMD", Case/Package=Nonstandard, Current Rating=4.2A, DC Resistance (DCR)=26.4mR, Inductance=3.9uH, Max Operating Temperature=85°C, Min Operating Temperature=-40°C, Resistor Type=Wirewound, Saturation Current=4.7A, Test Frequency=100kHz, Tolerance=30%, Core Material=Ferrite, Height - Seated (Max)=0.177inch, Length=0.248inch, Mount="Surface Mount", Packaging="Tape and Reel", Shielding=Shielded, Width=0.248inch
LS1: library part CMP-00027-00003-1, "Audio Indicator 12V 12mA 110dBA 3.5KHz Resonant Frequency Thru-Hole"
P1: library part CMP-1681-00006-4, "Male Header, Pitch 2.54 mm, 2 x 4 Position, Height 8.38 mm, Tail Length 5.08 mm, -55 to 125 degC, RoHS, Bulk", Colour=Black, Current Rating="7.6 A", Manufacturer=Samtec, Package Quantity=1, Voltage Rating="550 V", ComponentLink1Description="Manufacturer URL", ComponentLink1URL=http://www.samtec.com/, ComponentLink2Description=Datasheet, ComponentLink2URL=https://datasheet.ciiva.com/25616/0900766b81154476-25616879.pdf, ComponentLink3Description="Package Specification", ComponentLink3URL=http://suddendocs.samtec.com/prints/tsw-xxx-xx-x-x-xx-xxx-footprint.pdf, Contact Finish=Gold, Contact Material=Bronze, Contact Plating=Gold, DatasheetVersion=04/2012, Lead Pitch="0.1 inch", Mount="Through Hole", Mounting Technology="Through Hole", PackageDescription="Male Header, Pitch 2.54 mm, 2 x 4 Position, Height 8.38 mm, Tail Length 5.08 mm", PackageReference=TSW-104-08-L-D, Packaging=Bulk, Pins=8, REACH SVHC="No SVHC", RoHSCompliant=true, Rows=2
Q1 Q4: library part CMP-013-00036-2, "Trans MOSFET P-CH 20V 22.1A 8-Pin PowerPAK 1212 EP T/R"
Q2: library part CMP-35916-000009-1, "MOSFET 2N-CH 60V 0.3A", Continuous Drain Current (ID)=300mA, Drain to Source Voltage (Vdss)=60V, Input Capacitance=40pF, Max Power Dissipation=285mW, FET Type="2 N-Channel", Mount="Surface Mount", Packaging="Tape and Reel", Rds On Max=1.5R
R1 R2 R3 R4 R6 R7 R9 R11_CAN_0 R11_CAN_1 R16 R18 R19 R22 R23 R26 R27 R33 R35: library part CMP-1012-00623-3, "Chip Resistor, 10 KOhm, +/- 1%, 0.1 W, -55 to 155 degC, 0603 (1608 Metric), RoHS, Tape and Reel", Case Code (Imperial)=0603, Case Code (Metric)=1608, Manufacturer=Panasonic, Max Operating Temperature=155degC, Max Power Dissipation=100mW, Min Operating Temperature=-55degC, Package Description="2-Pin Surface Mount Device, Body 1.6 x 0.85 mm", Package Quantity=1, Package Reference=603, Resistance=10KOhm, Temperature Coefficient=100ppm\/degreesC, Tolerance=1%, Voltage Rating=75V, Case\/Package=0603, Composition=ThickFilm, Contact Plating=Tin, Datasheet URL=https://industrial.panasonic.com/cdbs/www-data/pdf/RDA0000/AOA0000C304.pdf, Datasheet Version=02/2017, Depth=0.8mm, Height=0.45mm, Lead Free=LeadFree, Length=1.6mm, Manufacturer URL=http://www.panasonic.com/, Military Standard=Not, Mount=SurfaceMount, Mounting Technology=SurfaceMount, Number of Pins=2, Number of Terminations=2, Packaging=TapeandReel, Power Rating=100mW, Radiation Hardening=No, REACH SVHC=NoSVHC, RoHSCompliant=true, Termination=SMD/SMT, Voltage Rating (DC)=75V, Width=0.031inch
R5 R8 R12_CAN_0 R12_CAN_1 R28: library part CMP-2000-00180-1, Manufacturer=Panasonic, Part Number=ERJ-3EKF1001V
R10_CAN_0 R10_CAN_1: library part CMP-2000-00213-2, "Chip Resistor, 120 Ohm, +/- 1%, 0.1 W, -55 to 155 degC, 0603 (1608 Metric), RoHS, Tape and Reel", Case Code (Imperial)=0603, Case Code (Metric)=1608, Manufacturer=Panasonic, Max Operating Temperature=155degC, Max Power Dissipation=100mW, Min Operating Temperature=-55degC, Package Description="2-Pin Surface Mount Device, Body 1.6 x 0.85 mm", Package Quantity=1, Resistance=120Ohm, Temperature Coefficient=100ppm/degreesC, Tolerance=1%, Voltage Rating=75V, Case/Package=0603, Composition=ThickFilm, Contact Plating=Tin, Datasheet URL=https://industrial.panasonic.com/cdbs/www-data/pdf/RDA0000/AOA0000C283.pdf, Datasheet Version=42095.0, Depth=0.8mm, Height=0.022inch, Lead Free=LeadFree, Length=1.6mm, Manufacturer URL=http://www.panasonic.com/, Military Standard=Not, Mount=SurfaceMount, Number of Pins=2, Number of Terminations=2, Package Reference=0603, Package URL=http://www.st.com/st-web-ui/static/active/en/resource/technical/document/datasheet/CD00001320.pdf, Packaging=TapeandReel, Power Rating=100mW, Radiation Hardening=No, REACH SVHC=NoSVHC, RoHSCompliant=true, Termination=SMD/SMT, Voltage Rating (DC)=75V, Width=0.031inch
R13_CAN_0 R13_CAN_1: library part CMP-009-00206-2, "READ THE NAME"
R14 R15 R17: library part CMP-2000-00182-1, Manufacturer=Panasonic, Part Number=ERJ-3EKF1003V
R20 R21 R24 R25 R29 R30 R34: library part CMP-2000-00547-1, Manufacturer=Panasonic, Part Number=ERJ3EKF51R0V
R31 R32 R36: library part CMP-2000-00435-2, "Chip Resistor, 330 Ohm, +/- 1%, 0.1 W, -55 to 155 degC, 0603 (1608 Metric), RoHS, Tape and Reel", Current Rating="500 mA", Max Operating Temperature="85 degC", Min Operating Temperature="-25 degC", Package Quantity=1500, Voltage Rating="10 V", ComponentLink1Description="Manufacturer URL", ComponentLink1URL=http://www.panasonic.com/, ComponentLink2Description=Datasheet, ComponentLink2URL=http://industrial.panasonic.com/cdbs/www-data/pdf/RDA0000/AOA0000C86.pdf, Contact Finish=Gold, Contact Material=Copper, Contact Plating=Gold, DatasheetVersion=Apr-15, Gender=Male, Height="1.45 mm", Lead Pitch="1.1 mm", Length="13.7 mm", Mating Cycles=10000, Mount="Surface Mount", PackageDescription="2-Pin Surface Mount Device, Body 1.6 x 0.85 mm", PackageReference=0603, Packaging="Tape and Reel", Pins=8, REACH SVHC="No SVHC", RoHSCompliant=true, Width="1.45 mm"
SD1: library part CMP-2000-05245-1, "MicroSD Card Connector, Hinge Type, -40 to 85 degC, 8-Pin SMD, RoHS, Tape and Reel", Current Rating=500mA, Manufacturer=Molex, Voltage Rating=100VDC, Brand=Molex, Card Type=microSD, Contact Material=CopperAlloy, Datasheet URL=http://www.molex.com/pdm_docs/sd/472192001_sd.pdf, Datasheet Version="Rev. F, 06/2009", Factory Pack Quantity=2400, Housing Material=Thermoplastic, Insertion - Extraction Style=Hinged, Manufacturer URL=http://www.molex.com/, Mounting Style=SMD/SMT, Number Of Contacts=8, Packaging=Reel, Pitch=1.09mm, Product=CardConnectors, Product Category=MemoryCardConnectors, RoHS=Details, Series=47219, Termination Style=SMD
SW1 SW2: library part CMP-10040-000029-1, "SWITCH TACTILE SPST-NO 0.02A 15V", Current Rating=5A, Flammability Rating="UL94 V-0", Insulation Color=Black, Max Operating Temperature=85°C, Min Operating Temperature=-40°C, Operating Force=240gf, Actuator Type=Standard, Connector Type=USB, Contact Plating=Gold, Gender=Receptacle, Illumination Type=Non-Illuminated, Mechanical Life=500000Cycles, Mount="Surface Mount", Number Of Contacts=24, Number of Ports=1, Packaging="Tape and Reel", Switch Function=Off-Mom, Switch Travel=0.13mm, Termination=Solder, Throw Configuration=SPST
U1 U6: library part CMP-014-00004-1, "LM2902 Series 30 V 1.3 MHz Low-Power Quad Operational Amplifier - QFN-16 (3x3)"
U2_CAN_0 U2_CAN_1: library part CMP-015-00012-2, "Automotive CAN FD transceiver with watchdog, bus diagnostics and partial networking via sele 14-SOT-23-THIN -40 to 150"